# EAGLE board EMG_SS19_Version_2.0 (EAGLE 9.4.2), part 1 of 2
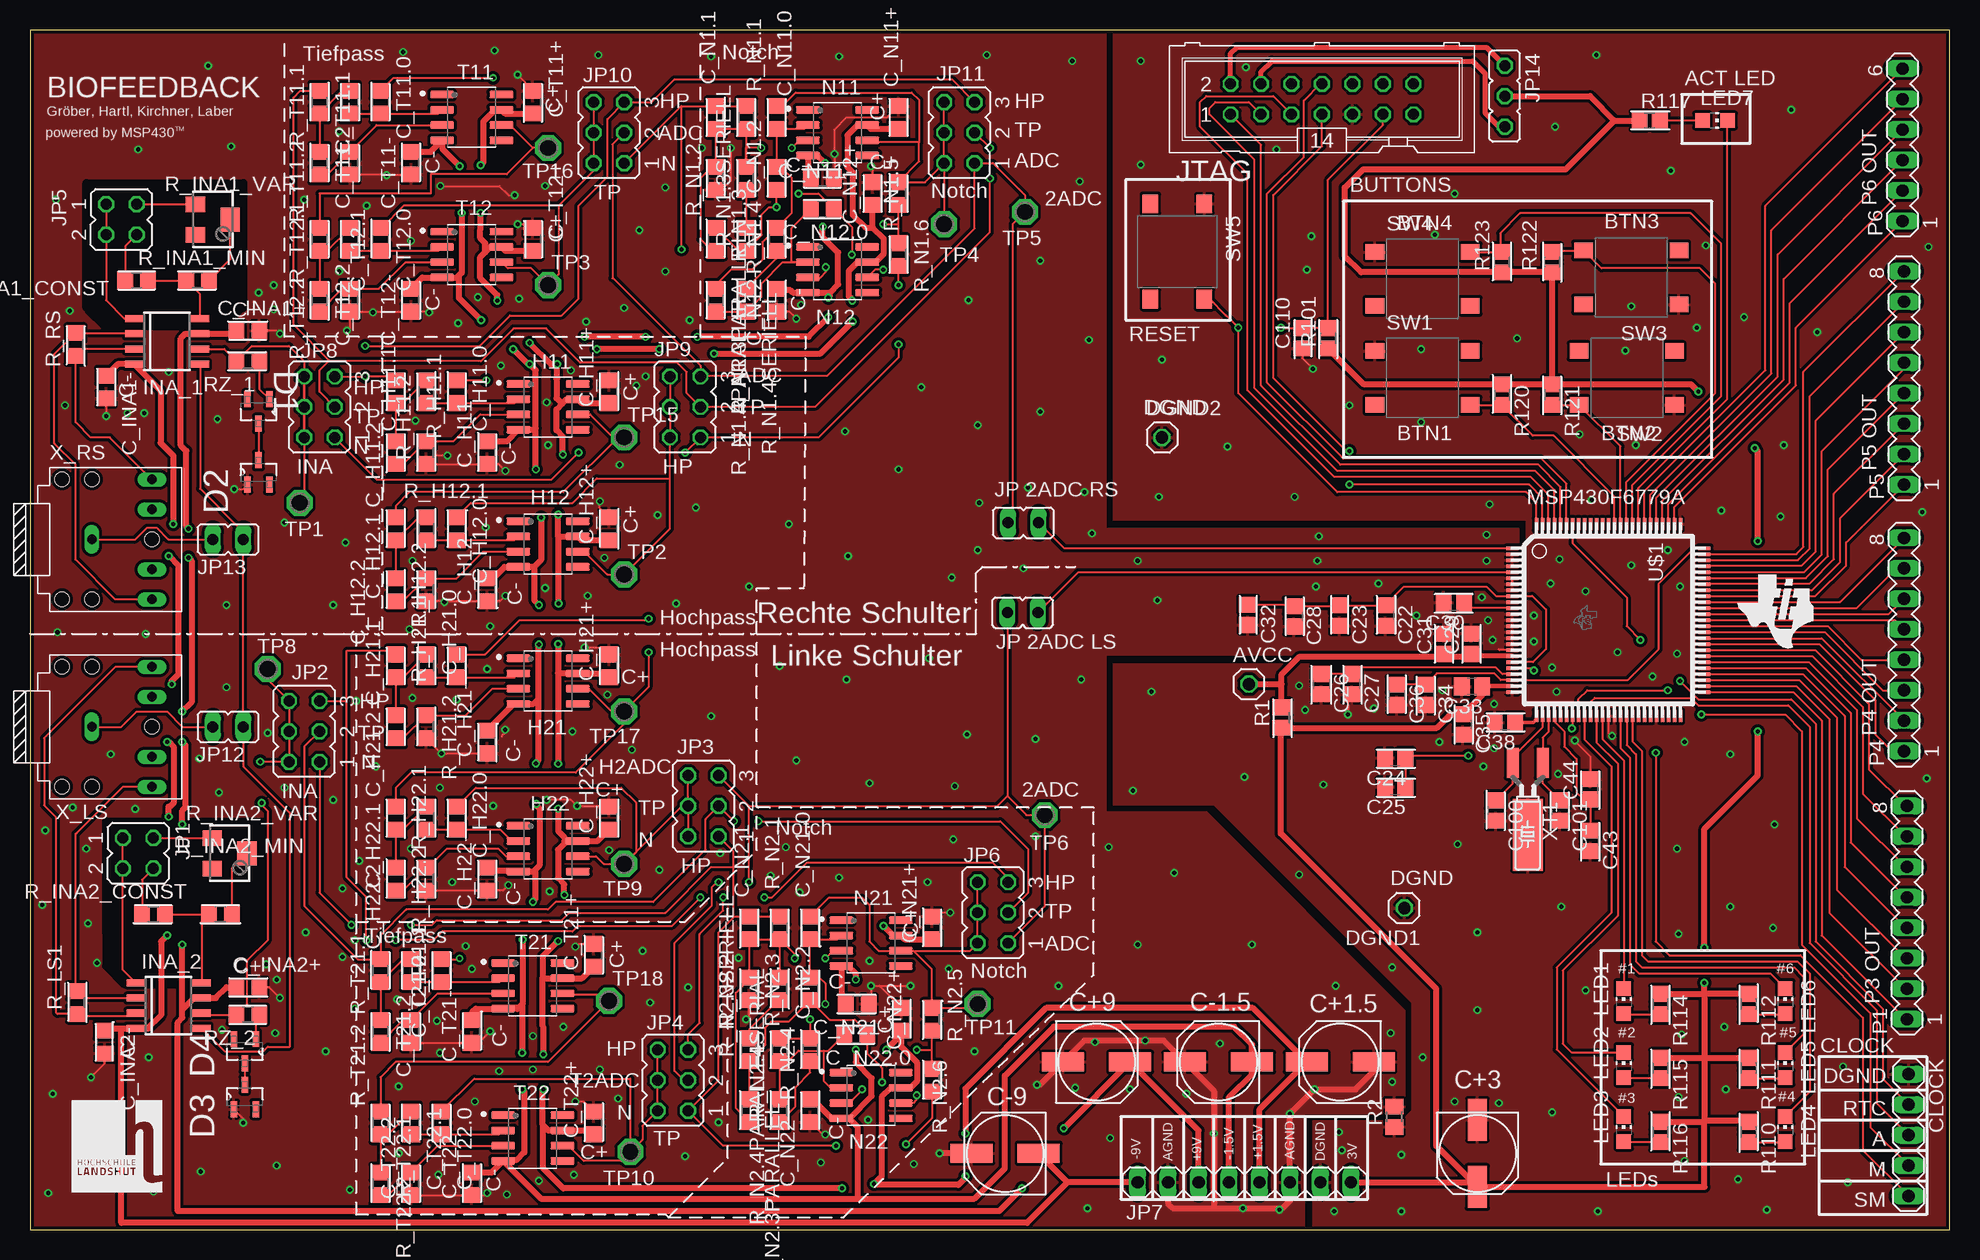
[diagram p0: board, top side]
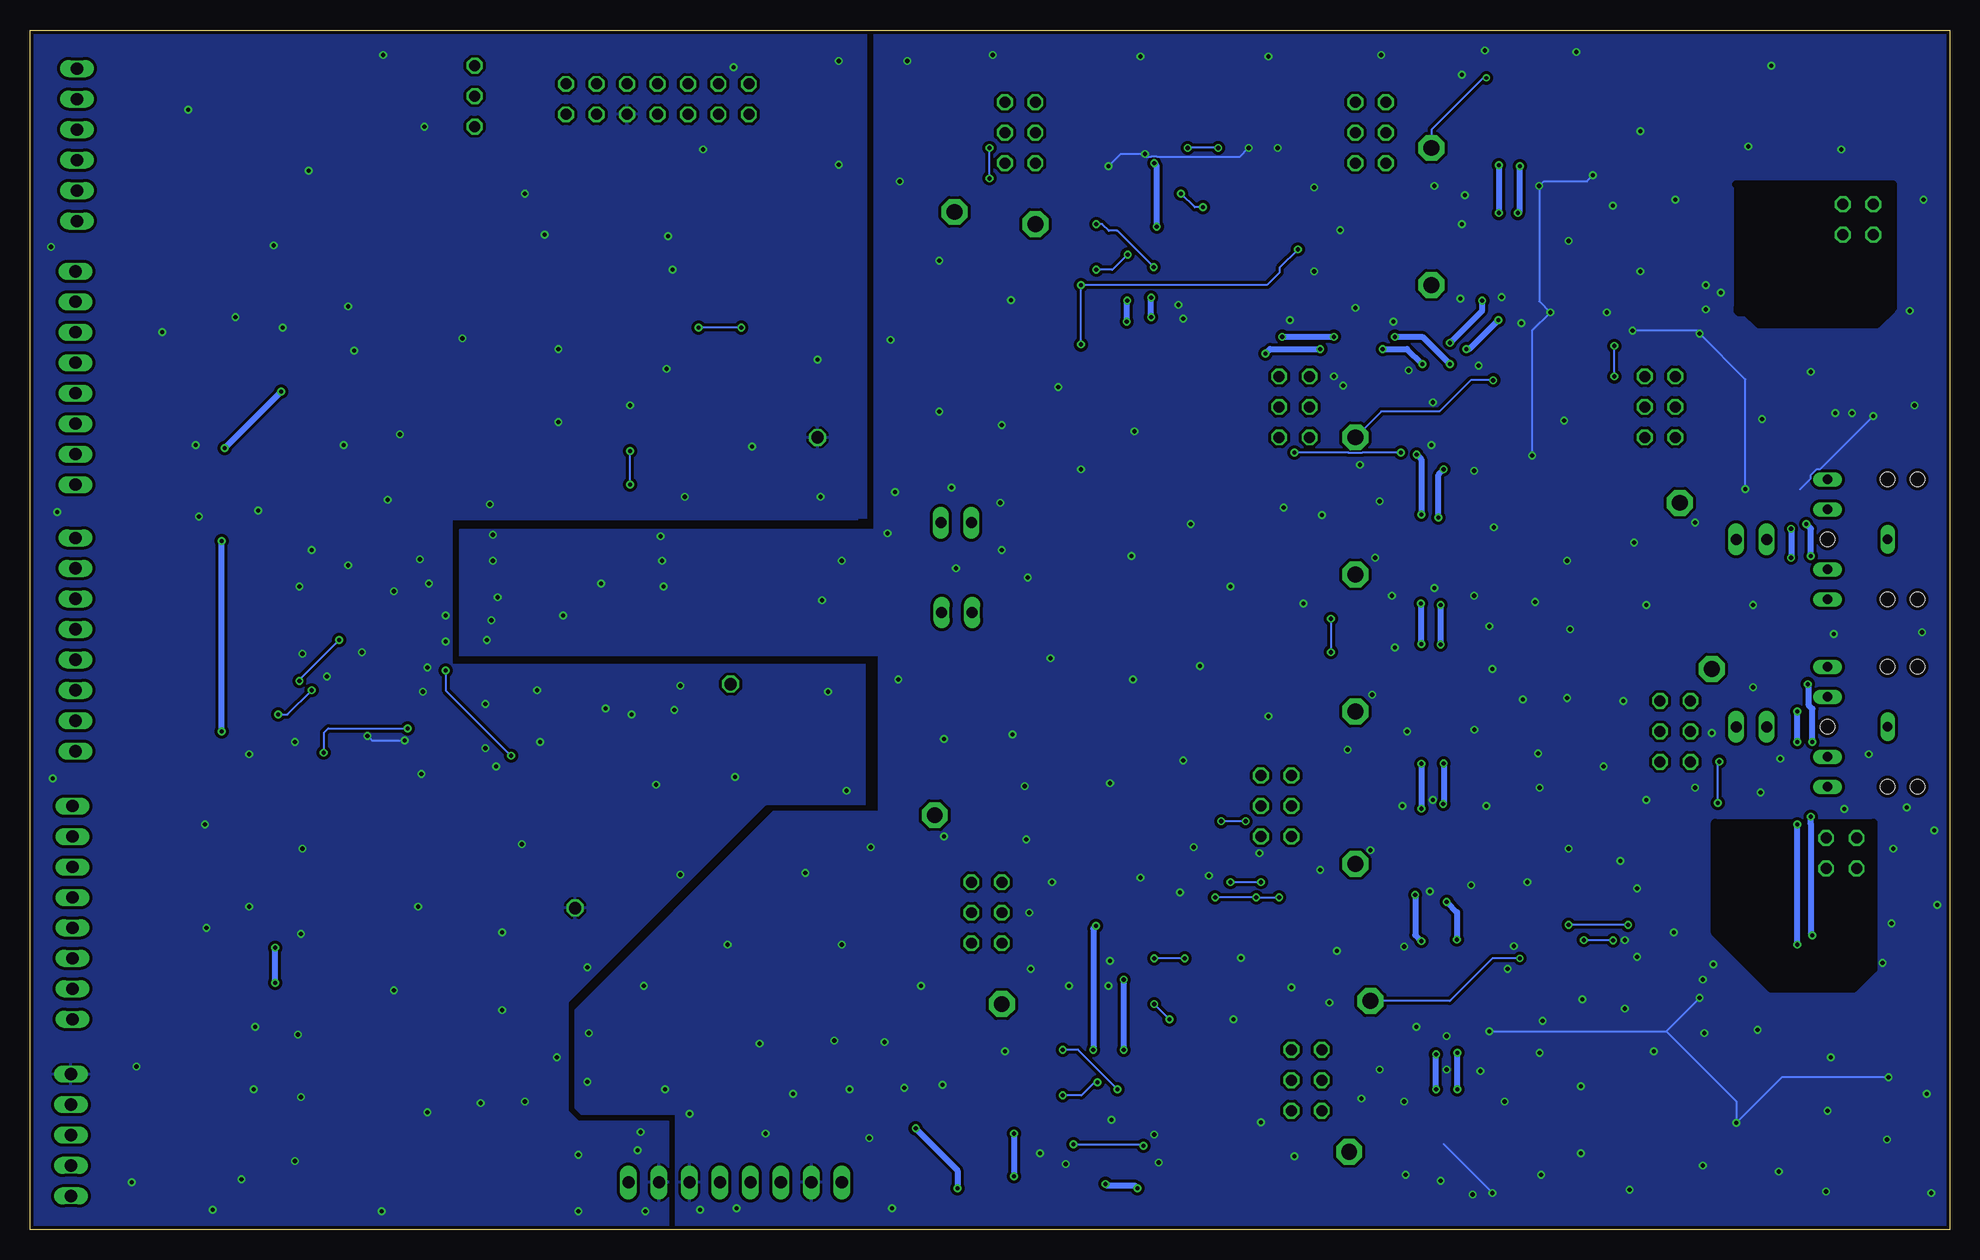
[diagram p1: board, bottom side, seen from below]

Size 160 x 100 mm. Coordinates in mm from the lower left corner, seen from the top.
Outline: 0,0 160,0 160,100 0,100 0,0
Copper layers (1*16): Top 0.035mm / dielectric 1.5mm / Bottom 0.035mm
Design rules "PCB-POOL Standard": minimum track width 0.15mm, minimum drill 0.3mm, track to track 0.15mm, track to pad 0.15mm, pad to pad 0.15mm, via to via 0.15mm, smd to smd 0.15mm, copper to edge 0.3mm, drill to drill 0.2mm, minimum pad ring 0.2mm, minimum via ring 0.15mm, stop-mask expansion 0.03mm, vias tented up to drill 0mil, thermal gap 0.2mm
tRestrict: area 4.7,76.8 to 17.8,87.2; area 6.3,24.9 to 19.7,34; area 4.8,75.3 to 17.7,76.8; area 6.3,20.4 to 19.7,24.9
bRestrict: area 4.7,76.8 to 17.8,87.1; area 6.3,24.9 to 19.6,33.9; area 6.3,20.1 to 19.6,24.9; area 4.8,75.4 to 17.7,76.8

## Footprints (pad centres in the part's own frame; a part is rotated, then mirrored left to right if it is on the bottom)
1X01 = drill 1.016 octagon: 1 0,0
C0805 = smd 1.3 x 1.5: 1 -0.85,0; 2 0.85,0
RADIAL_SMD_ELKO_6_3 = smd 3.5 x 1.6: + 2.8,0; - -2.8,0
C0805' = smd 1.3 x 1.5: 1 -0.95,0; 2 0.95,0
MA05-1 = drill 1.016 long: 1 -5.08,0; 2 -2.54,0; 3 0,0; 4 2.54,0; 5 5.08,0
SOT-23 = smd 1.321 x 0.559: 1 -1.016,0.914; 2 -1.016,-0.914; 3 1.016,0
SOIC127P600X175-8N = smd 1.97 x 0.6: 1 -2.475,1.905; 2 -2.475,0.635; 3 -2.475,-0.635; 4 -2.475,-1.905; 5 2.475,-1.905; 6 2.475,-0.635; 7 2.475,0.635; 8 2.475,1.905
SOIC8 = smd 0.6 x 1.5: 1 -1.905,-2.75; 2 -0.635,-2.75; 3 0.635,-2.75; 4 1.905,-2.75; 5 1.905,2.75; 6 0.635,2.75; 7 -0.635,2.75; 8 -1.905,2.75
JP2Q = drill 0.914 octagon: 1 -1.27,-1.27; 2 -1.27,1.27; 3 1.27,-1.27; 4 1.27,1.27
JP3Q = drill 0.914 octagon: 1 -2.54,-1.27; 2 -2.54,1.27; 3 0,-1.27; 4 0,1.27; 5 2.54,-1.27; 6 2.54,1.27
1X08 = drill 1.016 long: 1 -8.89,0; 2 -6.35,0; 3 -3.81,0; 4 -1.27,0; 5 1.27,0; 6 3.81,0; 7 6.35,0; 8 8.89,0
JP1 = drill 0.914 long: 1 0,-1.27; 2 0,1.27
JP2 = drill 0.914 octagon: 1 -2.54,0; 2 0,0; 3 2.54,0
ML14 = drill 0.914 octagon: 1 -7.62,-1.27; 2 -7.62,1.27; 3 -5.08,-1.27; 4 -5.08,1.27; 5 -2.54,-1.27; 6 -2.54,1.27; 7 0,-1.27; 8 0,1.27; 9 2.54,-1.27; 10 2.54,1.27; 11 5.08,-1.27; 12 5.08,1.27; 13 7.62,-1.27; 14 7.62,1.27
CHIP-LED0805 = smd 1.2 x 1.2: A 0,-1.05; C 0,1.05
MA08-1 = drill 1.016 long: 1 -8.89,0; 2 -6.35,0; 3 -3.81,0; 4 -1.27,0; 5 1.27,0; 6 3.81,0; 7 6.35,0; 8 8.89,0
MA06-1 = drill 1.016 long: 1 -6.35,0; 2 -3.81,0; 3 -1.27,0; 4 1.27,0; 5 3.81,0; 6 6.35,0
R0805 = smd 1.3 x 1.5: 1 -0.85,0; 2 0.85,0
R0805' = smd 1.3 x 1.5: 1 -0.95,0; 2 0.95,0
SM-42/43W = smd 1.3 x 1.6: 1 -1.27,-1.45; 3 1.27,-1.45 | smd 2 x 1.6: 2 0,1.45
SW_B3S-1000 = smd 1.55 x 1.3: 1 3.975,-2.25; 2 -3.975,-2.25; 3 3.975,2.25; 4 -3.975,2.25
P1-13 = drill 1.321 pad 2.159 octagon: TP 0,0
S-PQFP-G100(PZ) = smd 0.29 x 1: 1 -6,-8; 2 -5.5,-8; 3 -5,-8; 4 -4.5,-8; 5 -4,-8; 6 -3.5,-8; 7 -3,-8; 8 -2.5,-8; 9 -2,-8; 10 -1.5,-8; 11 -1,-8; 12 -0.5,-8; 13 0,-8; 14 0.5,-8; 15 1,-8; 16 1.5,-8; 17 2,-8; 18 2.5,-8; 19 3,-8; 20 3.5,-8; 21 4,-8; 22 4.5,-8; 23 5,-8; 24 5.5,-8; 25 6,-8; 51 6,8; 52 5.5,8; 53 5,8; 54 4.5,8; 55 4,8; 56 3.5,8; 57 3,8; 58 2.5,8; 59 2,8; 60 1.5,8; 61 1,8; 62 0.5,8; 63 0,8; 64 -0.5,8; 65 -1,8; 66 -1.5,8; 67 -2,8; 68 -2.5,8; 69 -3,8; 70 -3.5,8; 71 -4,8; 72 -4.5,8; 73 -5,8; 74 -5.5,8; 75 -6,8 | smd 1 x 0.29: 26 8,-6; 27 8,-5.5; 28 8,-5; 29 8,-4.5; 30 8,-4; 31 8,-3.5; 32 8,-3; 33 8,-2.5; 34 8,-2; 35 8,-1.5; 36 8,-1; 37 8,-0.5; 38 8,0; 39 8,0.5; 40 8,1; 41 8,1.5; 42 8,2; 43 8,2.5; 44 8,3; 45 8,3.5; 46 8,4; 47 8,4.5; 48 8,5; 49 8,5.5; 50 8,6; 76 -8,6; 77 -8,5.5; 78 -8,5; 79 -8,4.5; 80 -8,4; 81 -8,3.5; 82 -8,3; 83 -8,2.5; 84 -8,2; 85 -8,1.5; 86 -8,1; 87 -8,0.5; 88 -8,0; 89 -8,-0.5; 90 -8,-1; 91 -8,-1.5; 92 -8,-2; 93 -8,-2.5; 94 -8,-3; 95 -8,-3.5; 96 -8,-4; 97 -8,-4.5; 98 -8,-5; 99 -8,-5.5; 100 -8,-6
FC68131-5P = drill 0.8 long: 1 -5,0; 2 0,-5; 3 0,-2.5; 4 0,2.5; 5 0,5 | hole 1.2: 0,0; -5,-5; -5,5; -7.5,5; -7.5,-5
CM200T = smd 1 x 2.5: P1 -1.25,-5; P2 1.25,-5 | smd 2.5 x 6: P3 0,1

## Placement (x,y rotation side)
AVCC  [1X01]  101.6,45.47 0 top
C22  4.7uF  [C0805]  112.97,51.18 270 top
C23  100nF  [C0805]  109.16,51.18 270 top
C24  4.7uF  [C0805]  113.79,39.31 180 top
C25  100nF  [C0805]  113.79,36.89 180 top
C26  4.7uF  [C0805]  107.63,45.47 270 top
C27  100nF  [C0805]  110.17,45.47 270 top
C28  100nF  [C0805]  105.35,51.12 270 top
C29  4.7uF  [C0805]  120.14,48.83 90 top
C30  100nF  [C0805]  118.68,52.26 180 top
C31  100nF  [C0805]  117.86,48.83 90 top
C32  4.7uF  [C0805]  101.54,51.24 270 top
C33  100nF  [C0805]  120.21,45.28 180 top
C34  4.7uF  [C0805]  116.33,44.58 270 top
C35  4.7uF  [C0805]  119.44,42.1 270 top
C36  100nF  [C0805]  113.92,44.58 270 top
C38  0.47uF  [C0805]  122.94,42.29 180 top
C43  100nF  [C0805]  130.05,32.38 270 top
C44  0.47uF  [C0805]  130.05,36.7 90 top
C100  12pF  [C0805]  122.17,34.92 270 top
C101  12pF  [C0805]  127.51,34.92 270 top
C110  0.1uF  [C0805]  106.05,74.3 90 top
C+1.5  100u  [RADIAL_SMD_ELKO_6_3]  109.22,13.97 180 top
C+3  100u  [RADIAL_SMD_ELKO_6_3]  120.65,6.35 270 top
C+9  100u  [RADIAL_SMD_ELKO_6_3]  88.9,13.97 0 top
C-1.5  100u  [RADIAL_SMD_ELKO_6_3]  99.06,13.97 180 top
C-9  100u  [RADIAL_SMD_ELKO_6_3]  81.28,6.35 180 top
C_H11+  100n  [C0805']  48.26,69.85 90 top
C_H11-  100n  [C0805']  38.1,64.77 90 top
C_H11.0  10p  [C0805']  35.56,69.85 270 top
C_H11.1  470n  [C0805']  30.48,69.85 270 top
C_H11.2  470n  [C0805']  30.48,64.77 270 top
C_H12+  100n  [C0805']  48.26,58.42 90 top
C_H12-  100n  [C0805']  38.1,53.34 90 top
C_H12.0  10p  [C0805']  35.56,58.42 270 top
C_H12.1  470n  [C0805']  30.48,58.42 270 top
C_H12.2  470n  [C0805']  30.48,53.34 270 top
C_H21+  100n  [C0805']  48.26,46.99 90 top
C_H21-  100n  [C0805']  38.1,40.64 90 top
C_H21.0  10p  [C0805']  35.56,46.99 270 top
C_H21.1  470n  [C0805']  30.48,46.99 270 top
C_H21.2  470n  [C0805']  30.48,41.91 270 top
C_H22+  100n  [C0805']  48.26,34.29 90 top
C_H22-  100n  [C0805']  38.1,29.21 90 top
C_H22.0  10p  [C0805']  35.56,34.29 270 top
C_H22.1  470n  [C0805']  30.48,34.29 270 top
C_H22.2  470n  [C0805']  30.48,29.21 270 top
C_INA1+  100n  [C0805']  18.16,74.93 0 top
C_INA1-  100n  [C0805']  6.35,70.23 270 top
C_INA2+  100n  [C0805']  18.16,20.19 0 top
C_INA2-  100n  [C0805']  6.22,15.62 270 top
C_N1.1  470n  [C0805']  57.15,92.71 270 top
C_N1.2  4.7n  [C0805']  62.23,87.63 90 top
C_N2.1  470n  [C0805']  59.94,25.15 270 top
C_N2.2  4.7n  [C0805']  65.02,20.07 90 top
C_N11+  100n  [C0805']  72.39,92.71 90 top
C_N11-  100n  [C0805']  66.04,87.63 180 top
C_N11.0  10p  [C0805']  62.23,92.71 270 top
C_N12+  100n  [C0805']  70.23,86.36 90 top
C_N12-  100n  [C0805']  62.23,77.47 90 top
C_N12.0  10p  [C0805']  66.04,85.09 0 top
C_N21+  100n  [C0805']  75.18,25.15 90 top
C_N21-  100n  [C0805']  68.96,18.8 180 top
C_N21.0  10p  [C0805']  65.02,25.15 270 top
C_N22+  100n  [C0805']  72.64,17.53 90 top
C_N22-  100n  [C0805']  65.02,9.91 90 top
C_N22.0  10p  [C0805']  68.83,16.26 0 top
C_T11+  100n  [C0805']  41.91,93.98 90 top
C_T11-  100n  [C0805']  31.75,88.9 90 top
C_T11.0  10p  [C0805']  29.21,93.98 270 top
C_T11.1  10n  [C0805']  26.67,93.98 270 top
C_T11.2  4.7n  [C0805']  26.67,88.9 90 top
C_T12+  100n  [C0805']  41.91,82.55 90 top
C_T12-  100n  [C0805']  31.75,77.47 90 top
C_T12.0  10p  [C0805']  29.21,82.55 270 top
C_T12.1  10n  [C0805']  26.67,82.55 270 top
C_T12.2  4.7n  [C0805']  26.67,77.47 90 top
C_T21+  100n  [C0805']  46.99,22.86 90 top
C_T21-  100n  [C0805']  36.83,16.51 90 top
C_T21.0  10p  [C0805']  34.29,21.59 270 top
C_T21.1  10n  [C0805']  31.75,21.59 270 top
C_T21.2  4.7n  [C0805']  31.75,16.51 90 top
C_T22+  100n  [C0805']  46.99,8.89 90 top
C_T22-  100n  [C0805']  36.83,3.81 90 top
C_T22.0  10p  [C0805']  34.29,8.89 270 top
C_T22.1  10n  [C0805']  31.75,8.89 270 top
C_T22.2  4.7n  [C0805']  31.75,3.81 90 top
CLOCK  [MA05-1]  156.59,7.87 270 top
D1  Zener  [SOT-23]  19.05,68.2 270 top
D2  Zener  [SOT-23]  19.05,63.12 90 top
D3  Zener  [SOT-23]  17.91,11.05 90 top
D4  Zener  [SOT-23]  17.91,14.86 270 top
DGND1  [1X01]  114.55,26.8 180 top
DGND2  [1X01]  94.36,66.04 0 top
H11  OPA388  [SOIC127P600X175-8N]  43.18,68.58 0 top
H12  OPA388  [SOIC127P600X175-8N]  43.18,57.15 0 top
H21  OPA388  [SOIC127P600X175-8N]  43.18,45.72 0 top
H22  OPA388  [SOIC127P600X175-8N]  43.18,31.75 0 top
INA_1  INA828ID  [SOIC8]  11.43,74.04 270 top
INA_2  INA828ID  [SOIC8]  11.56,18.67 270 top
JP1  [JP2Q]  9.02,31.37 270 top
JP2  [JP3Q]  22.86,41.53 90 top
JP3  [JP3Q]  56.13,35.31 90 top
JP4  [JP3Q]  53.59,12.45 90 top
JP5  [JP2Q]  7.62,84.2 270 top
JP6  [JP3Q]  80.26,26.42 90 top
JP7  [1X08]  101.22,3.94 0 top
JP8  [JP3Q]  24.13,68.58 90 top
JP9  [JP3Q]  54.61,68.58 90 top
JP10  [JP3Q]  48.26,91.44 90 top
JP11  [JP3Q]  77.47,91.44 90 top
JP12  [JP1]  16.51,41.91 90 top
JP13  [JP1]  16.51,57.53 90 top
JP14  [JP2]  122.94,94.49 270 top
JP15  [JP1]  82.8,58.93 90 top
JP16  [JP1]  82.74,51.44 90 top
JTAG  [ML14]  107.7,94.23 0 top
LED1  [CHIP-LED0805]  132.84,19.05 0 top
LED2  [CHIP-LED0805]  132.84,13.72 0 top
LED3  [CHIP-LED0805]  132.84,8.38 0 top
LED4  [CHIP-LED0805]  146.3,8.38 0 top
LED5  [CHIP-LED0805]  146.3,13.72 0 top
LED6  [CHIP-LED0805]  146.3,19.05 0 top
LED7  [CHIP-LED0805]  140.46,92.46 270 top
N11  OPA388  [SOIC127P600X175-8N]  67.31,91.44 0 top
N12  OPA388  [SOIC127P600X175-8N]  67.31,80.01 0 top
N21  OPA388  [SOIC127P600X175-8N]  70.1,23.88 0 top
N22  OPA388  [SOIC127P600X175-8N]  70.1,11.18 0 top
P1  [MA08-1]  156.46,26.42 90 top
P4  [MA08-1]  156.21,48.77 90 top
P5  [MA08-1]  156.21,70.99 90 top
P6  [MA06-1]  156.08,90.42 90 top
R1  10R  [R0805]  104.33,42.67 90 top
R2  0R  [R0805]  113.73,9.4 90 top
R101  47K  [R0805]  108.2,74.3 90 top
R110  100  [R0805]  143.26,8.13 270 top
R111  100  [R0805]  143.26,13.46 270 top
R112  100  [R0805]  143.26,18.8 270 top
R114  100  [R0805]  135.89,18.8 270 top
R115  100  [R0805]  135.89,13.46 270 top
R116  100  [R0805]  135.89,8.13 270 top
R117  100  [R0805]  135,92.46 0 top
R120  100K  [R0805]  122.68,69.6 270 top
R121  100K  [R0805]  126.87,69.6 270 top
R122  100K  [R0805]  126.87,80.64 90 top
R123  100K  [R0805]  122.68,80.64 90 top
R_H11.1  48k  [R0805']  33.02,69.85 270 top
R_H11.2  100k  [R0805']  33.02,64.77 90 top
R_H12.1  48k  [R0805']  33.02,58.42 270 top
R_H12.2  100k  [R0805']  33.02,53.34 90 top
R_H21.1  48k  [R0805']  33.02,46.99 270 top
R_H21.2  100k  [R0805']  33.02,41.91 90 top
R_H22.1  48k  [R0805']  33.02,34.29 270 top
R_H22.2  100k  [R0805']  33.02,29.21 90 top
R_INA1_CONST  200  [R0805']  8.89,79.12 0 top
R_INA1_MIN  50  [R0805']  13.97,79.12 180 top
R_INA1_VAR  200  [SM-42/43W]  15.24,84.2 270 top
R_INA2_CONST  200  [R0805']  10.29,26.29 0 top
R_INA2_MIN  50  [R0805']  15.88,26.29 180 top
R_INA2_VAR  200  [SM-42/43W]  16.64,31.37 270 top
R_LS1  10Meg  [R0805']  3.94,18.92 90 top
R_N1.1  138k  [R0805']  59.69,92.71 270 top
R_N1.2  138k  [R0805']  57.15,87.63 90 top
R_N1.3  6.8k  [R0805']  59.69,87.63 90 top
R_N1.3PARALLEL  dnp  [R0805']  57.15,82.55 270 top
R_N1.3SERIELL  0  [R0805']  59.69,82.55 90 top
R_N1.4  6.8k  [R0805']  62.23,82.55 270 top
R_N1.4PARALLEL  dnp  [R0805']  57.15,77.47 270 top
R_N1.4SERIELL  0  [R0805']  59.69,77.47 270 top
R_N1.5  100k  [R0805']  72.39,86.36 90 top
R_N1.6  100k  [R0805']  72.39,81.28 90 top
R_N2.1  138k  [R0805']  62.48,25.15 270 top
R_N2.2  138k  [R0805']  59.94,20.07 90 top
R_N2.3  6.8k  [R0805']  62.48,20.07 90 top
R_N2.3PARALLEL  dnp  [R0805']  59.94,9.91 270 top
R_N2.3SERIELL  0  [R0805']  59.94,14.99 90 top
R_N2.4  6.8k  [R0805']  65.02,14.99 270 top
R_N2.4PARALLEL  dnp  [R0805']  62.48,14.99 270 top
R_N2.4SERIAL  0  [R0805']  62.48,9.91 90 top
R_N2.5  100k  [R0805']  75.18,17.53 90 top
R_N2.6  100k  [R0805']  75.18,12.45 90 top
R_RS  10Meg  [R0805']  3.81,73.79 90 top
R_T11.1  47k  [R0805']  24.13,93.98 270 top
R_T11.2  47k  [R0805']  24.13,88.9 270 top
R_T12.1  47k  [R0805']  24.13,82.55 270 top
R_T12.2  47k  [R0805']  24.13,77.47 270 top
R_T21.1  47k  [R0805']  29.21,21.59 270 top
R_T21.2  47k  [R0805']  29.21,16.51 270 top
R_T22.1  47k  [R0805']  29.21,8.89 270 top
R_T22.2  47k  [R0805']  29.21,3.81 270 top
RZ_1  2k  [R0805']  18.16,72.39 180 top
RZ_2  2k  [R0805']  18.16,17.91 180 top
SW1  B3S-1000  [SW_B3S-1000]  116.08,70.99 0 top
SW2  B3S-1000  [SW_B3S-1000]  133.1,70.99 180 top
SW3  B3S-1000  [SW_B3S-1000]  133.48,79.38 180 top
SW4  B3S-1000  [SW_B3S-1000]  116.08,79.25 0 top
SW5  B3S-1000  [SW_B3S-1000]  95.63,81.53 270 top
T11  OPA388  [SOIC127P600X175-8N]  36.83,92.71 0 top
T12  OPA388  [SOIC127P600X175-8N]  36.83,81.28 0 top
T21  OPA388  [SOIC127P600X175-8N]  41.91,20.32 0 top
T22  OPA388  [SOIC127P600X175-8N]  41.91,7.62 0 top
TP1  TPPAD1-13  [P1-13]  22.48,60.58 0 top
TP2  TPPAD1-13  [P1-13]  49.53,54.61 0 top
TP3  TPPAD1-13  [P1-13]  43.18,78.74 0 top
TP4  TPPAD1-13  [P1-13]  76.2,83.82 0 top
TP5  RS_TO_ADC  [P1-13]  82.93,84.84 0 top
TP6  LS_TO_ADC  [P1-13]  84.58,34.54 0 top
TP8  TPPAD1-13  [P1-13]  19.81,46.74 0 top
TP9  TPPAD1-13  [P1-13]  49.53,30.48 0 top
TP10  TPPAD1-13  [P1-13]  50.04,6.48 0 top
TP11  TPPAD1-13  [P1-13]  78.99,18.8 0 top
TP15  TPPAD1-13  [P1-13]  49.53,66.04 0 top
TP16  TPPAD1-13  [P1-13]  43.18,90.17 0 top
TP17  TPPAD1-13  [P1-13]  49.53,43.18 0 top
TP18  TPPAD1-13  [P1-13]  48.26,19.05 0 top
U$1  MSP430F6779PZ  [S-PQFP-G100(PZ)]  131.57,50.8 270 top
X_LS  KLINKENBUCHSE  [FC68131-5P]  10.16,41.91 0 top
X_RS  KLINKENBUCHSE  [FC68131-5P]  10.16,57.53 0 top
XT1  [CM200T]  124.84,33.91 180 top

## Library data of the parts
AVCC DGND1 DGND2 JP7 = pinhead
C22-C36 C38 C43 C44 C100 C101 C110 R1 R2 R101 R110-R112 R114-R117 R120-R123 = resistor
C+1.5 C+3 C+9 C-1.5 C-9 = Elko_Footprint; AVAILABILITY: Unavailable; DESCRIPTION: SMD Aluminium Electrolytic Capacitor, WCAP-ASLI Series, 100 F, 35 V, Radial Can - SMD, 6.3 mm; MF: Wurth Electronics; MP: 865080545012; PACKAGE: Radial Wurth Electronics; PRICE: None
C_H11+ C_H11- C_H11.0 C_H11.1 C_H11.2 C_H12+ C_H12- C_H12.0 C_H12.1 C_H12.2 C_H21+ C_H21- C_H21.0 C_H21.1 C_H21.2 C_H22+ C_H22- C_H22.0 C_H22.1 C_H22.2 C_INA1+ C_INA1- C_INA2+ C_INA2- C_N1.1 C_N1.2 C_N2.1 C_N2.2 C_N11+ C_N11- C_N11.0 C_N12+ C_N12- C_N12.0 C_N21+ C_N21- C_N21.0 C_N22+ C_N22- C_N22.0 C_T11+ C_T11- C_T11.0 C_T11.1 C_T11.2 C_T12+ C_T12- C_T12.0 C_T12.1 C_T12.2 C_T21+ C_T21- C_T21.0 C_T21.1 C_T21.2 C_T22+ C_T22- C_T22.0 C_T22.1 C_T22.2 = rcl; SPICEPREFIX: C
CLOCK P1 P4-P6 = con-lstb; OC_FARNELL: unknown; OC_NEWARK: unknown
D1-D4 = Zener_8_2; AVAILABILITY: Unavailable; DESCRIPTION: Battery Management IC Automotive 3-Pin SOT-23 T/R; MF: Diodes Inc.; MP: ZXCT1109SA-7; PACKAGE: SOT-23-3 Diodes Inc.; PRICE: None
H11 H12 H21 H22 N11 N12 N21 N22 T11 T12 T21 T22 = OPA388
INA_1 INA_2 = INA828ID; DESCRIPTION: 50-μV Offset, 7-nV/√Hz Noise, Low-Power, Precision Instrumentation Amplifier 8-SOIC -40 to 125; DIGI-KEY_PART_NUMBER: 296-47415-ND; DIGI-KEY_PURCHASE_URL: https://www.digikey.com/product-detail/en/texas-instruments/INA828ID/296-47415-ND/7695275?utm_source=snapeda&utm_medium=aggregator&utm_campaign=symbol; MF: Texas Instruments; MP: INA828ID; PACKAGE: SOIC-8 Texas Instruments
JP1-JP6 JP8-JP13 JP15 JP16 = jumper
JP14 = custom_jumper
JTAG = con-ml; OC_FARNELL: unknown; OC_NEWARK: unknown
LED1-LED7 = led
R_H11.1 R_H11.2 R_H12.1 R_H12.2 R_H21.1 R_H21.2 R_H22.1 R_H22.2 R_INA1_CONST R_INA1_MIN R_INA2_CONST R_INA2_MIN R_LS1 R_N1.1-R_N1.3 R_N1.3PARALLEL R_N1.3SERIELL R_N1.4 R_N1.4PARALLEL R_N1.4SERIELL R_N1.5 R_N1.6 R_N2.1-R_N2.3 R_N2.3PARALLEL R_N2.3SERIELL R_N2.4 R_N2.4PARALLEL R_N2.4SERIAL R_N2.5 R_N2.6 R_RS R_T11.1 R_T11.2 R_T12.1 R_T12.2 R_T21.1 R_T21.2 R_T22.1 R_T22.2 RZ_1 RZ_2 = rcl; SPICEPREFIX: R
R_INA1_VAR R_INA2_VAR = pot; SPICEPREFIX: J
SW1-SW5 = B3S-1000; AVAILABILITY: Unavailable; DESCRIPTION: Switch Tactile N.O. SPST Round Button Gull Wing 0.05A 24VDC 500000Cycles 1.57N SMD Bag; MF: Omron; MP: B3S-1000; PACKAGE: None; PRICE: None
TP1-TP6 TP8-TP11 TP15-TP18 = testpad
U$1 = MSP430F6779
X_LS X_RS = Klinkenbuchse_FC68131; AVAILABILITY: Unavailable; DESCRIPTION: Stereo Jack, 3.5mm, 3pos, Pcb; MF: Cliff; MP: FC68131; PACKAGE: None; PRICE: None
XT1 = F20xx PIR Demo & Eval

## Nets
+1.5V: C+1.5.+ C_H11+.1 C_H12+.1 C_H21+.1 C_H22+.1 C_N11+.1 C_N12+.1 C_N21+.1 C_N22+.1 C_T11+.1 C_T12+.1 C_T21+.1 C_T22+.1 H11.7 H12.7 H21.7 H22.7 JP7.5 N11.7 N12.7 N21.7 N22.7 T11.7 T12.7 T21.7 T22.7
+9V: C+9.+ C_INA1+.1 C_INA2+.1 INA_1.7 INA_2.7 JP7.3
-1.5V: C-1.5.- C_H11-.2 C_H12-.2 C_H21-.2 C_H22-.2 C_N11-.2 C_N12-.2 C_N21-.2 C_N22-.2 C_T11-.2 C_T12-.2 C_T21-.2 C_T22-.2 H11.4 H12.4 H21.4 H22.4 JP7.4 N11.4 N12.4 N21.4 N22.4 T11.4 T12.4 T21.4 T22.4
-9V: C-9.- C_INA1-.1 C_INA2-.1 INA_1.4 INA_2.4 JP7.1
ACLK: CLOCK.3 U$1.35
ACT_LED: LED7.C U$1.83
AGND: C22.2 C23.2 C28.2 C29.2 C30.2 C31.2 C32.2 C+1.5.- C+9.- C-1.5.+ C-9.+ C_H11+.2 C_H11-.1 C_H12+.2 C_H12-.1 C_H21+.2 C_H21-.1 C_H22+.2 C_H22-.1 C_INA1+.2 C_INA1-.2 C_INA2+.2 C_INA2-.2 C_N11+.2 C_N11-.1 C_N12+.2 C_N12-.1 C_N21+.2 C_N21-.1 C_N22+.2 C_N22-.1 C_T11+.2 C_T11-.1 C_T11.2.1 C_T12+.2 C_T12-.1 C_T12.2.1 C_T21+.2 C_T21-.1 C_T21.2.1 C_T22+.2 C_T22-.1 C_T22.2.1 D2.1 D3.1 JP7.2 JP7.6 R2.2 R_H11.2.1 R_H12.2.1 R_H21.2.1 R_H22.2.1 R_N1.2.1 R_N2.2.1 U$1.2 U$1.3 U$1.4 U$1.6 U$1.7 U$1.8 U$1.10 U$1.12 U$1.13 U$1.14 U$1.15 U$1.16 U$1.17 U$1.18
AUXVCC1: C26.1 C27.1 U$1.22
AUXVCC2: C24.1 C25.1 U$1.21
AUXVCC3: C43.1 C44.1 U$1.29
AVCC: AVCC.1 C29.1 C31.1 R1.2 U$1.19
BTN1: R120.2 SW1.1 U$1.87
BTN2: R121.2 SW2.3 U$1.86
BTN3: R122.2 SW3.1 U$1.85
BTN4: R123.2 SW4.3 U$1.84
DGND: C24.2 C25.2 C26.2 C27.2 C33.2 C34.2 C35.2 C36.2 C38.2 C43.2 C44.2 C100.2 C101.2 C110.1 C+3.- CLOCK.1 DGND1.1 DGND2.1 JP7.7 JTAG.9 R2.1 SW1.4 SW2.4 SW3.4 SW4.4 SW5.4 U$1.25 U$1.38 U$1.39 U$1.46 U$1.76 XT1.P3
DVCC: C33.1 C35.1 C+3.+ JP7.8 JP14.2 R1.1 R101.1 R110.1 R111.1 R112.1 R114.1 R115.1 R116.1 R117.1 R120.1 R121.1 R122.1 R123.1 U$1.24
DVSYS: C34.1 C36.1 U$1.23 U$1.75
EXT: JP14.3 JTAG.4
H1_OUT: C_H12.0.1 H12.6 JP9.2 JP9.4 JP9.6 TP2.TP
H2_OUT: C_H22.0.1 H22.6 JP3.2 JP3.4 JP3.6 TP9.TP
H11_OUT: C_H11.0.1 C_H12.1.1 H11.6 TP15.TP
H21_OUT: C_H21.0.1 C_H22.1.1 H21.6 TP17.TP
INA1_OUT: INA_1.6 JP8.2 JP8.4 JP8.6 RZ_1.2 TP1.TP
INA2_OUT: INA_2.6 JP2.2 JP2.4 JP2.6 RZ_2.2 TP8.TP
INT: JP14.1 JTAG.2
LED1: LED1.C U$1.37
LED2: LED2.C U$1.36
LED3: LED3.C U$1.34
LED4: LED4.C U$1.42
LED5: LED5.C U$1.41
LED6: LED6.C U$1.40
LS+: INA_2.3 R_LS1.1 X_LS.5
LS-: INA_2.2 R_LS1.2 X_LS.2
LS_TO_ADC2: JP3.5 JP4.3 JP6.1 JP16.2 TP6.TP
MCLK: CLOCK.4 U$1.33
N1_OUT: C_N11.0.1 JP11.2 JP11.4 JP11.6 N11.6 R_N1.5.2 TP4.TP
N2_OUT: C_N21.0.1 JP6.2 JP6.4 JP6.6 N21.6 R_N2.5.2 TP11.TP
N$1: R_INA2_MIN.1 R_INA2_VAR.2
N$3: C_H11.1.2 C_H11.2.1 R_H11.1.1
N$4: C_H11.2.2 H11.3 R_H11.2.2
N$5: D1.1 RZ_1.1
N$6: D1.3 D2.3
N$7: C_H12.1.2 C_H12.2.1 R_H12.1.1
N$8: C_H12.2.2 H12.3 R_H12.2.2
N$9: C_T11.1.1 R_T11.1.2 R_T11.2.1
N$10: C_H11.0.2 H11.2 R_H11.1.2
N$11: C_T11.2.2 R_T11.2.2 T11.3
N$12: C_T12.1.1 R_T12.1.2 R_T12.2.1
N$13: C_H12.0.2 H12.2 R_H12.1.2
N$14: C_T12.2.2 R_T12.2.2 T12.3
N$15: C_T12.0.2 C_T12.1.2 T12.2
N$16: JP5.4 R_INA1_CONST.1
N$17: C_N1.1.2 N11.3 R_N1.1.2 R_N1.2.2 R_N1.3.2 R_N1.3PARALLEL.2
N$18: C_N1.2.1 C_N12.0.2 N12.6 R_N1.3PARALLEL.1 R_N1.3SERIELL.1
N$19: C_N1.2.2 C_N11.0.2 N11.2 R_N1.4.1 R_N1.4PARALLEL.1
N$20: C_N12.0.1 N12.2 R_N1.4PARALLEL.2 R_N1.4SERIELL.2
N$21: C_T11.0.2 C_T11.1.2 T11.2
N$22: N12.3 R_N1.5.1 R_N1.6.2
N$23: LED1.A R114.2
N$24: C_H21.1.2 C_H21.2.1 R_H21.1.1
N$25: C_H21.2.2 H21.3 R_H21.2.2
N$26: C_H22.1.2 C_H22.2.1 R_H22.1.1
N$27: C_H22.2.2 H22.3 R_H22.2.2
N$28: C_T21.1.1 R_T21.1.2 R_T21.2.1
N$29: C_T21.2.2 R_T21.2.2 T21.3
N$30: C_T22.1.1 R_T22.1.2 R_T22.2.1
N$31: C_T22.2.2 R_T22.2.2 T22.3
N$32: C_N2.1.2 N21.3 R_N2.1.2 R_N2.2.2 R_N2.3.2 R_N2.3PARALLEL.2
N$33: C_N2.2.1 C_N22.0.2 N22.6 R_N2.3PARALLEL.1 R_N2.3SERIELL.1
N$34: C_N2.2.2 C_N21.0.2 N21.2 R_N2.4.1 R_N2.4PARALLEL.1
N$35: C_N22.0.1 N22.2 R_N2.4PARALLEL.2 R_N2.4SERIAL.2
N$36: N22.3 R_N2.5.1 R_N2.6.2
N$37: JP1.4 R_INA2_CONST.1
N$38: LED2.A R115.2
N$39: JP1.2 R_INA2_VAR.1
N$40: JP5.2 R_INA1_VAR.1
N$41: C_H21.1.1 JP2.5 JP4.5 JP6.5
N$42: C_H11.1.1 JP8.5 JP10.5 JP11.5
N$43: JP2.3 JP3.3 JP6.3 R_T21.1.1
N$44: C_N2.1.1 JP2.1 JP3.1 JP4.1 R_N2.1.1 R_N2.6.1
N$45: JP8.3 JP9.3 JP11.3 R_T11.1.1
N$46: LED3.A R116.2
N$47: LED7.A R117.2
N$48: LED4.A R110.2
N$49: C_N1.1.1 JP8.1 JP9.1 JP10.1 R_N1.1.1 R_N1.6.1
N$50: D4.1 RZ_2.1
N$51: D3.3 D4.3
N$52: C_H21.0.2 H21.2 R_H21.1.2
N$53: LED5.A R111.2
N$54: R_INA1_MIN.1 R_INA1_VAR.2
N$55: LED6.A R112.2
N$56: SW2.1
N$58: C_H22.0.2 H22.2 R_H22.1.2
N$59: C_T22.0.2 C_T22.1.2 T22.2
N$60: C_T21.0.2 C_T21.1.2 T21.2
N$61: JP12.2 X_LS.1
N$62: JP13.2 X_RS.1
N$70: P1.1 U$1.51
N$71: P1.2 U$1.52
N$72: P1.3 U$1.53
N$73: P1.4 U$1.54
N$74: P1.5 U$1.55
N$75: P1.6 U$1.56
N$76: P1.7 U$1.57
N$77: P1.8 U$1.58
N$83: P5.1 U$1.67
N$84: P5.2 U$1.68
N$85: P5.3 U$1.69
N$86: P5.4 U$1.70
N$87: P5.5 U$1.71
N$88: P5.6 U$1.72
N$89: P5.7 U$1.73
N$90: P5.8 U$1.74
N$91: P4.5 U$1.63
N$92: P6.2 U$1.78
N$93: P6.1 U$1.77
N$94: R_N2.4.2 R_N2.4SERIAL.1
N$95: R_N2.3.1 R_N2.3SERIELL.2
N$96: R_N1.3.1 R_N1.3SERIELL.2
N$97: R_N1.4.2 R_N1.4SERIELL.1
P4.0: P4.1 U$1.59
P4.1: P4.2 U$1.60
P4.2: P4.3 U$1.61
P4.3: P4.4 U$1.62
P4.5: P4.6 U$1.64
P4.6: P4.7 U$1.65
P4.7: P4.8 U$1.66
P6.2: P6.3 U$1.79
P6.3: P6.4 U$1.80
P6.4: P6.5 U$1.81
P6.5: P6.6 U$1.82
REF: INA_1.5 INA_2.5 JP12.1 JP13.1
RESET: C110.2 JTAG.11 R101.2 SW5.3 U$1.100
RG1+: INA_1.1 JP5.1 JP5.3
RG1-: INA_1.8 R_INA1_CONST.2 R_INA1_MIN.2
RG2+: INA_2.1 JP1.1 JP1.3
RG2-: INA_2.8 R_INA2_CONST.2 R_INA2_MIN.2
RS+: INA_1.3 R_RS.1 X_RS.5
RS-: INA_1.2 R_RS.2 X_RS.2
RS_TO_ADC1: JP9.5 JP10.3 JP11.1 JP15.2 TP5.TP
RTCCLK: CLOCK.2 U$1.94
SD_IN_1P: JP15.1 U$1.1
SD_IN_2P: JP16.1 U$1.5
SMCLK: CLOCK.5 U$1.32
T1_OUT: C_T12.0.1 JP10.2 JP10.4 JP10.6 T12.6 TP3.TP
T2_OUT: C_T22.0.1 JP4.2 JP4.4 JP4.6 T22.6 TP10.TP
T11_OUT: C_T11.0.1 R_T12.1.1 T11.6 TP16.TP
T21_OUT: C_T21.0.1 R_T22.1.1 T21.6 TP18.TP
TCK: JTAG.7 U$1.99
TDI: JTAG.3 U$1.97
TDO: JTAG.1 U$1.96
TEST/SBWTCK: JTAG.8 U$1.95
TMS: JTAG.5 U$1.98
VASYS1/2: C22.1 C23.1 C28.1 C32.1 U$1.9 U$1.20
VCORE: C38.1 U$1.26
VREF: C30.1 U$1.11
XIN: C100.1 U$1.27 XT1.P2
XOUT: C101.1 U$1.28 XT1.P1